# Altium PCB PCB_Master_Screen.PcbDoc
Units mm, origin at the board's own origin, x right, y up, seen from the top; angles counter-clockwise.
Board outline 112.9 x 78.91 mm, 2 copper layers (Top Layer, Bottom Layer), stack 1.571 mm thick; 43 components, 29 nets, 155 pads, 242 vias.
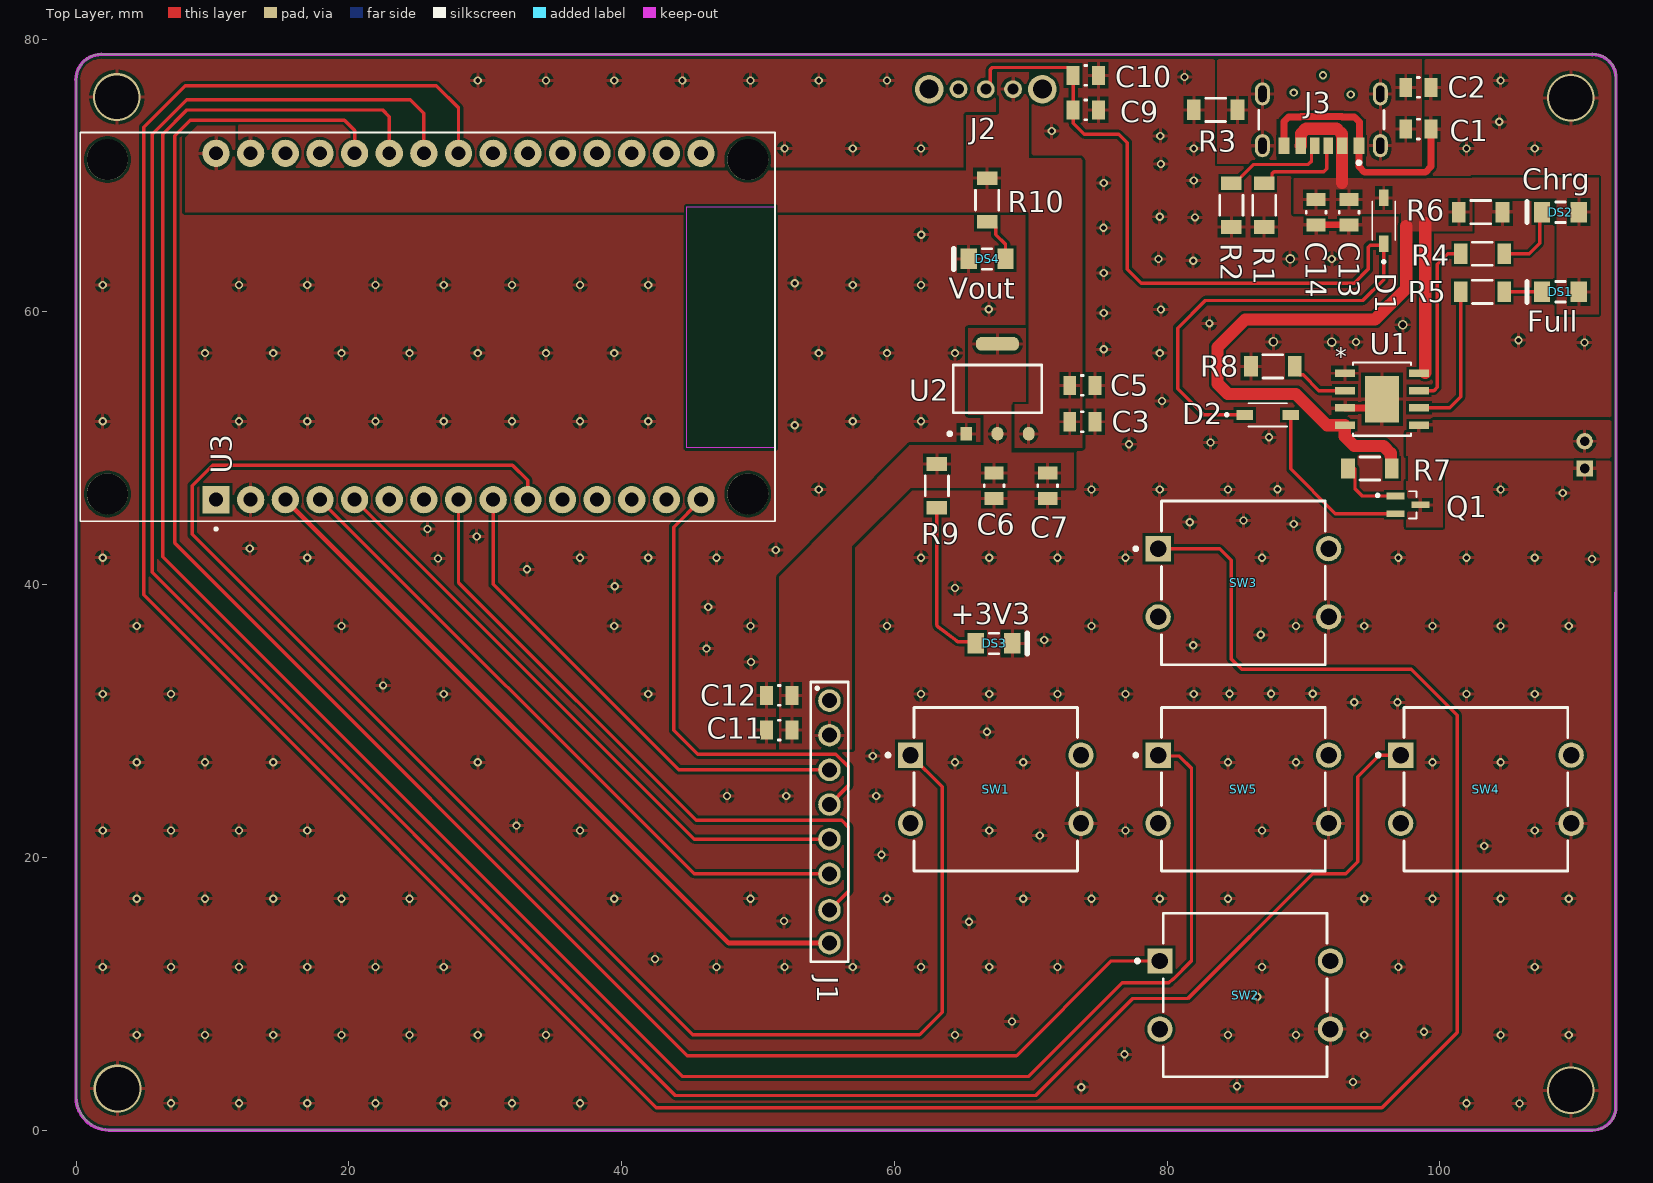
[diagram p0: Top Layer view]
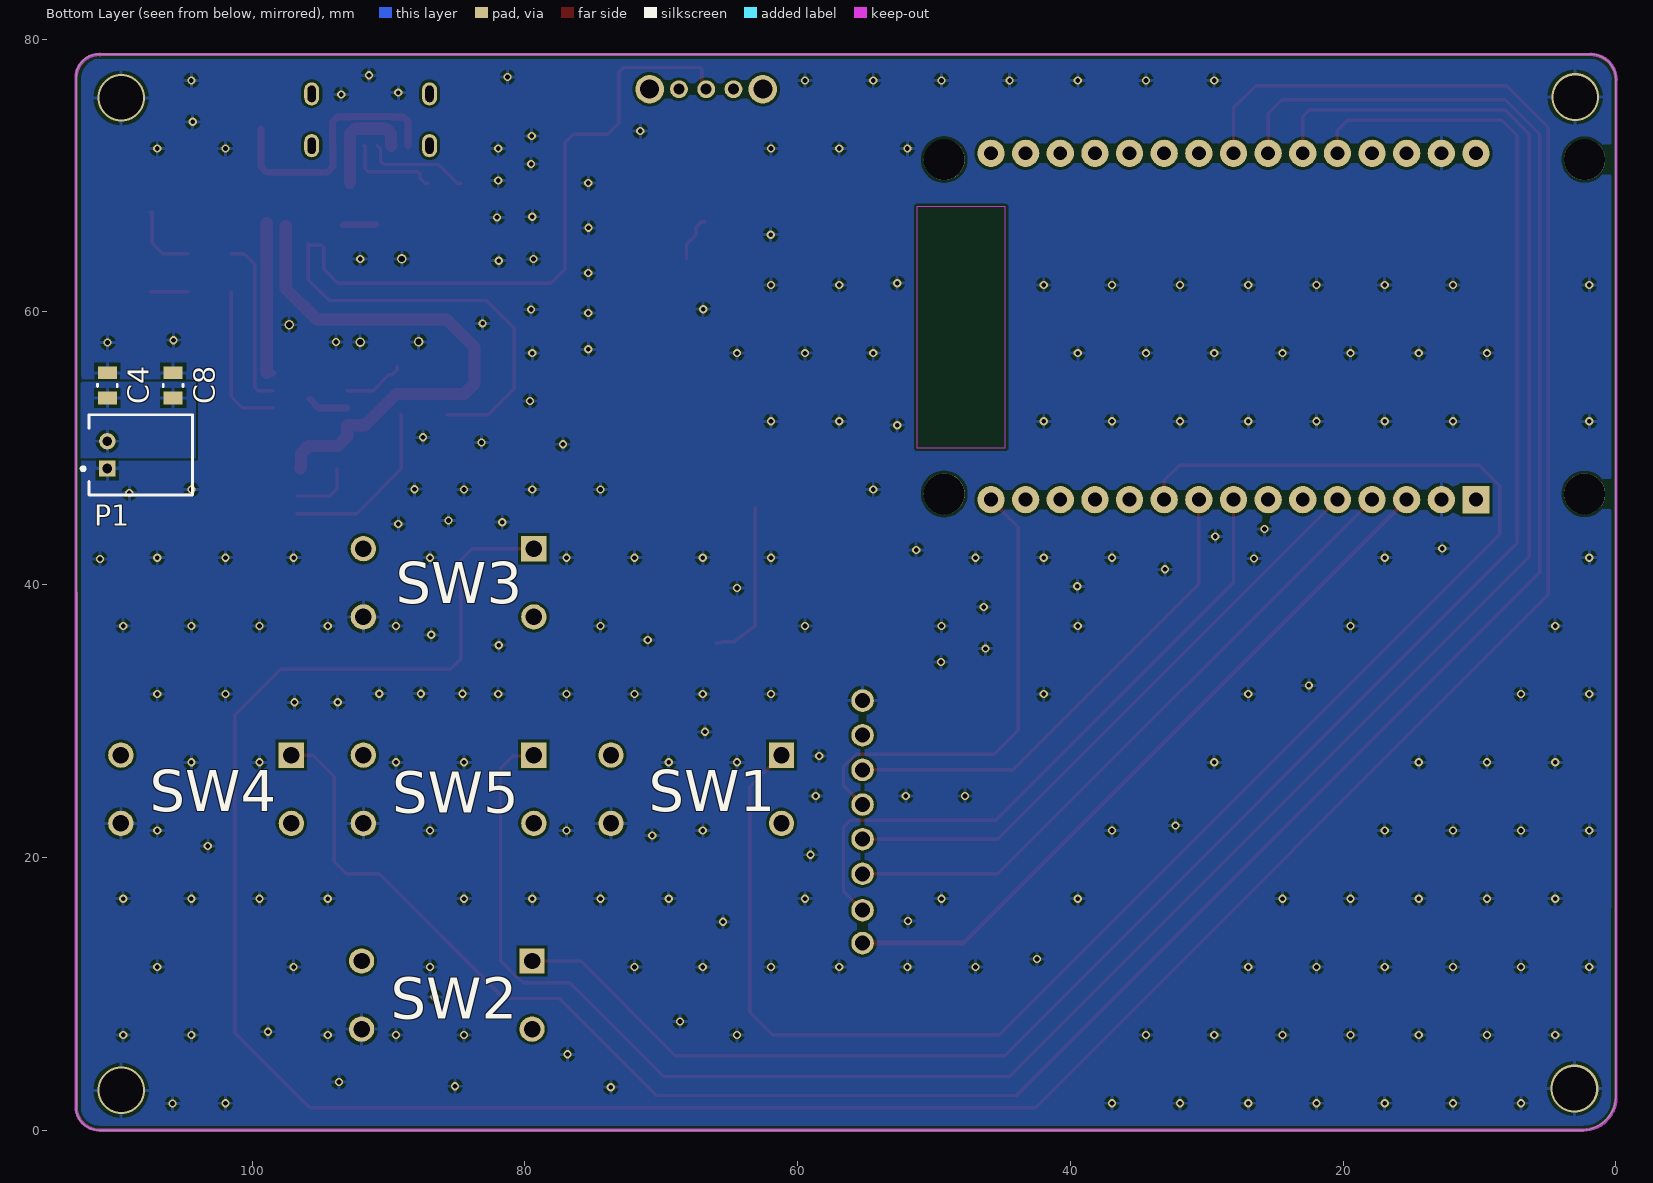
[diagram p1: Bottom Layer view, seen from below]
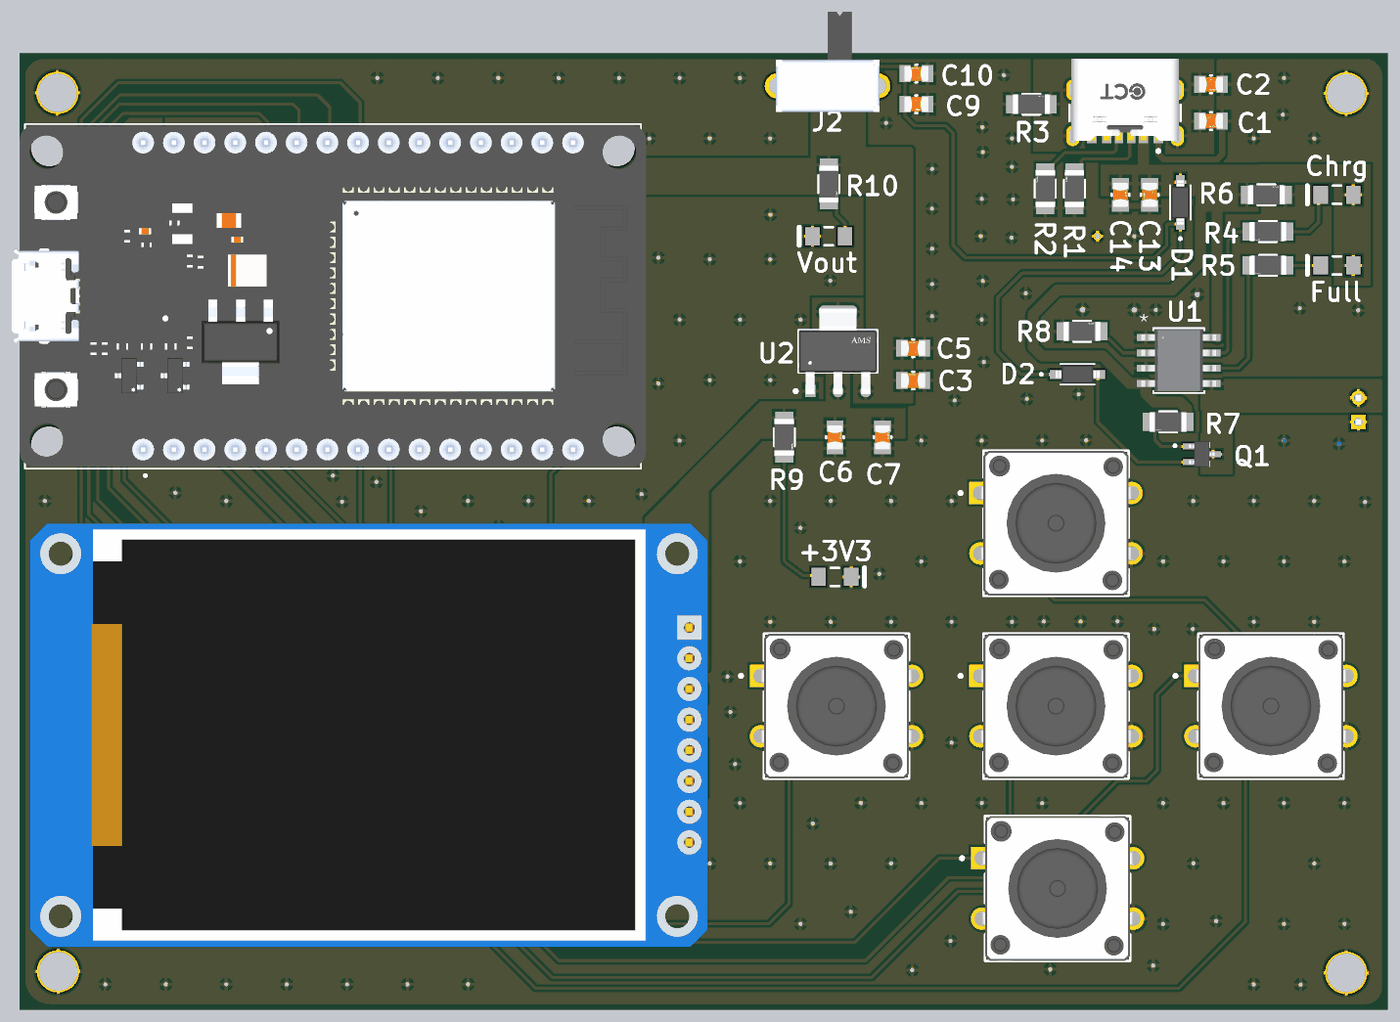
[diagram p2: 3D render of the assembled board from above, using the file's embedded part models]
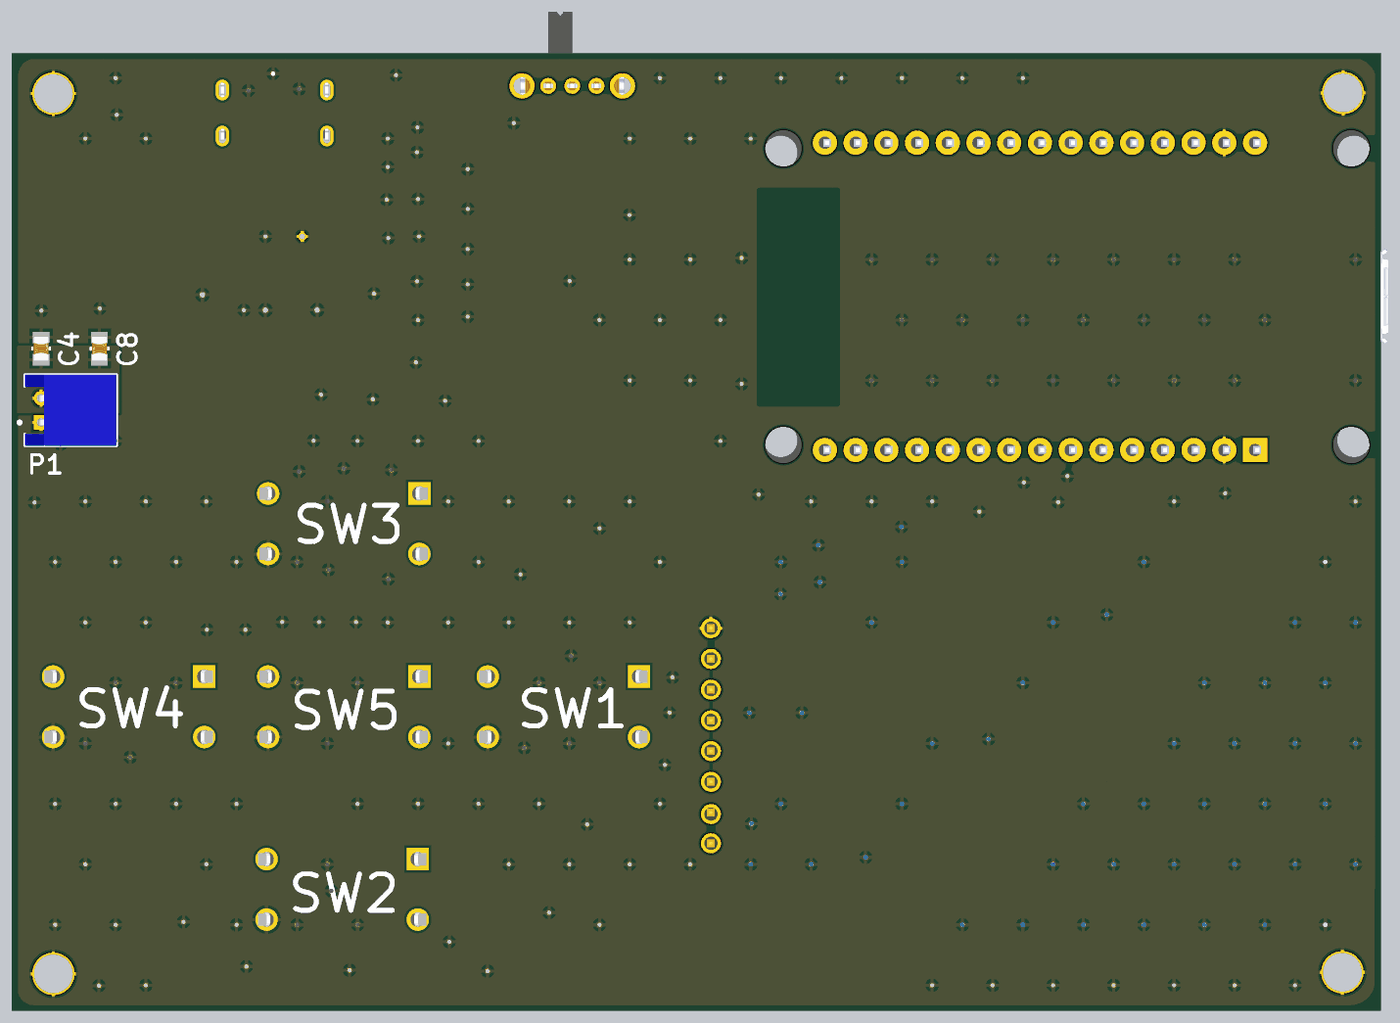
[diagram p3: 3D render of the assembled board from below, using the file's embedded part models]

## Layer stack, top to bottom
Top Solder: solder mask 0.0102, Solder Resist, Dk 3.5
Top Layer: signal copper 0.0356
Dielectric 1: dielectric 1.5, FR-4, Dk 4.8
Bottom Layer: signal copper 0.0356
Bottom Solder: solder mask 0.0102, Solder Resist, Dk 3.5

## Board outline
0,2.54 0,77 cw(c1.905,77) 1.905,78.905 111.252,78.905 111.233,78.905 cw(c111.233,77.235) 112.903,77.235 112.903,1.651 cw(c111.252,1.651) 111.252,0 2.54,0 cw(c2.54,2.54)

## Design rules (kind name [scope] priority, off if disabled: settings)
Clearance [All] p1: gap=0.2 ignorepadtopadclearanceinfootprint=FALSE
HoleSize HoleSize_1 [All] p1: absolutevalues=TRUE maxlimit=6.3 minlimit=0.15 maxpercent=80.000 minpercent=20.000
MinimumSolderMaskSliver MinimumSolderMaskSliver_Switch [InComponent('J2')] p1: minsoldermaskwidth=0.15
MinimumSolderMaskSliver [All] p2: minsoldermaskwidth=0.254
PolygonConnect [All] p1: connectstyle=Relief reliefconductorwidth=0.254 reliefentries=4 polygonreliefangle="90 Angle" airgapwidth=0.254
RoutingVias [All] p1: holewidth=0.3 width=0.3 viastyle="Through Hole" minholewidth=0.3 minwidth=0.25 maxholewidth=6.3 maxwidth=6.3
SolderMaskExpansion [All] p1: expansion=0.102 istentingtop=FALSE
SupplyNets "Schematic Supply Nets_5" [InNet('GND')] p1: voltage=0.000
SupplyNets "Schematic Supply Nets_4" [InNet('VOUT')] p2: voltage=0.000
SupplyNets "Schematic Supply Nets_3" [InNet('VBUS')] p3: voltage=0.000
SupplyNets "Schematic Supply Nets_2" [InNet('VBAT')] p4: voltage=0.000
SupplyNets "Schematic Supply Nets_1" [InNet('+3V3')] p5: voltage=0.000
SupplyNets "Schematic Supply Nets" [InNet('GND_EARTH')] p6: voltage=0.000
Width Width_BL [InNet('BL')] p1: maxlimit=0.5 minlimit=0.3 preferedwidth=0.3 minimp=50.000000 maximp=50.000000 favimp=50.000000
Width Width_Power [InNet('GND_EARTH') OR InNet('+3V3')OR InNet('VBUS')OR InNet('GND') OR InNet('VBAT') OR InNet('VOUT')] p2: maxlimit=1 minlimit=0.5 preferedwidth=0.6 minimp=50.000000 maximp=50.000000 favimp=50.000000
Width Width_1 [All] p3: maxlimit=0.3 minlimit=0.15 preferedwidth=0.2 minimp=50.000000 maximp=50.000000 favimp=50.000000
28 further rules are at their usual default settings.

## Components (designator, comment, footprint, x,y, rotation, side; value= is the part's Value field where it differs from the comment)
C1 "100nF" FP-CC0805-0_85-MFG 98.425,73.406 r0 top value="100 nF"
C2 "1nF" FP-CC0805-0_85-MFG 98.425,76.454 r0 top value="100 nF"
C3 "10uF" FP-CC0805-0_85-MFG 73.787,51.943 r180 top value="100 nF"
C4 "100nF" FP-CC0805-0_85-MFG 110.617,54.61 r90 bottom value="100 nF"
C5 "100nF" FP-CC0805-0_85-MFG 73.787,54.61 r180 top value="100 nF"
C6 "10uF" FP-CC0805-0_85-MFG 67.31,47.244 r90 top value="100 nF"
C7 "100nF" FP-CC0805-0_85-MFG 71.247,47.244 r90 top value="100 nF"
C8 "10uF" FP-CC0805-0_85-MFG 105.791,54.61 r270 bottom value="100 nF"
C9 "10uF" FP-CC0805-0_85-MFG 74.041,74.803 r0 top value="100 nF"
C10 "100nF" FP-CC0805-0_85-MFG 74.041,77.343 r180 top value="100 nF"
C11 "100nF" FP-CC0805-0_85-MFG 51.562,29.337 r0 top value="100 nF"
C12 "10uF" FP-CC0805-0_85-MFG 51.562,31.877 r180 top value="100 nF"
C13 "100nF" FP-CC0805-0_85-MFG 93.345,67.31 r270 top value="100 nF"
C14 "10uF" FP-CC0805-0_85-MFG 90.932,67.31 r90 top value="100 nF"
D1 "1N5819HW-7-F" SOD3715X145N 95.885,66.675 r90 top value="Vf = 450 mV"
D2 "1N5819HW-7-F" SOD3715X145N 87.376,52.451 r0 top value="Vf = 450 mV"
DS1 "Green LED" LUMX-SML-LX1206IC_V 108.839,61.468 r180 top
DS2 "Red LED" LUMX-SML-LX1206IC_V 108.839,67.31 r180 top
DS3 "Red LED" LUMX-SML-LX1206IC_V 67.31,35.687 r0 top
DS4 "Green LED" LUMX-SML-LX1206IC_V 66.802,63.881 r180 top
J1 "ST7735" ST7735 55.245,22.606 r270 top locked value="1.8 Inch 128x160"
J2 "SK12D07VG4" SK12D07VG4 66.707,76.327 r180 top value="0.3A @ 30 VDC"
J3 "USB4125-GF-A-0190" FP-USB4125-GF-A-0190-MFG 91.313,75.184 r180 top
P1 "S2B-PH-K-S(LF)(SN)" JST-S2B-PH-K-S_V 108.167,49.514 r90 bottom locked
Q1 "BSS84W-7-F" SOT65P222X110-3N 97.663,45.847 r0 top value="0 V 130mA"
R1 "5.1k" FP-RC1206-MFG 87.122,67.818 r90 top value=0Ω
R2 "5.1k" FP-RC1206-MFG 84.709,67.818 r90 top value=0Ω
R3 "1M" FP-RC1206-MFG 83.566,74.803 r0 top value=0Ω
R4 "1k" FP-RC1206-MFG 103.124,64.262 r180 top value=0Ω
R5 "1k" FP-RC1206-MFG 103.124,61.468 r180 top value=0Ω
R6 "100k" FP-RC1206-MFG 102.997,67.31 r0 top value=0Ω
R7 "100R" FP-RC1206-MFG 94.869,48.514 r180 top value=0Ω
R8 "1k" FP-RC1206-MFG 87.757,56.007 r0 top value=0Ω
R9 "330R" FP-RC1206-MFG 63.119,47.244 r270 top value=0Ω
R10 "330R" FP-RC1206-MFG 66.802,68.199 r270 top value=0Ω
SW1 "MJTP1212A" FP-MJTP1212A-MFG 67.437,24.997 r0 top locked value="0.05A @ 12VDC"
SW2 "MJTP1212A" FP-MJTP1212A-MFG 85.725,9.906 r0 top locked value="0.05A @ 12VDC"
SW3 "MJTP1212A" FP-MJTP1212A-MFG 85.598,40.132 r0 top locked value="0.05A @ 12VDC"
SW4 "MJTP1212A" FP-MJTP1212A-MFG 103.378,24.997 r0 top locked value="0.05A @ 12VDC"
SW5 "MJTP1212A" FP-MJTP1212A-MFG 85.598,24.997 r0 top locked value="0.05A @ 12VDC"
U1 "TP4056" SOP8-PP_TPW 95.758,53.594 r0 top value="1A single cell"
U2 "AMS1117-3.3" FP-AMS1117-IPC_C 67.564,54.356 r90 top
U3 "ESP32-DEVKIT-V1" MODULE_ESP32_DEVKIT_V1 25.781,58.928 r90 top locked value="Dual Core, Wi-Fi, BLE"

## Footprints (in the part's own frame and the unit in brackets; to place one, negate y for a bottom-side part, rotate by r counter-clockwise, add the part's x,y. Pads: shape width x height; smd on the part's side, far side on the other; paste and mask are expansions set on the pad)
FP-AMS1117-IPC_C [mm]
  rect 1.004x0.872 smd paste+0 mask+0: 1(-3.295,2.29)
  rrect100% 1.004x0.872 smd paste+0 mask+0: 2(-3.295,0) 3(-3.295,-2.29)
  rrect87% 1.004x3.182 smd paste+0 mask+0: 4(3.295,0)
  silkscreen extent -3.42,-3.25 1.75,3.62, body extent -3.9,-3.35 3.9,3.35, height 0.25
FP-CC0805-0_85-MFG [mm]
  rect 0.95x1.4 smd paste+0 mask+0: 1(-0.925,0) 2(0.925,0)
  silkscreen extent -0.08,-0.72 0.08,0.72, body extent -1.6,-1.05 1.6,1.05, height 0.25
FP-MJTP1212A-MFG [mm]
  rect 1.85x1.85 hole 1.2 paste-2539.97 mask+0: 1(-6.25,2.5)
  round 1.85 hole 1.2 paste-2539.97 mask+0: 2(6.25,2.5) 3(-6.25,-2.5) 4(6.25,-2.5)
  silkscreen extent -8.02,-6 6,6, body extent -7.27,-6.1 7.27,6.1, height 0.25
FP-RC1206-MFG [mm]
  rect 1x1.5 smd paste+0 mask+0: 1(-1.6,0) 2(1.6,0)
  silkscreen extent -0.72,-0.85 0.72,0.85, body extent -2.2,-0.95 2.2,0.95, height 0.25
FP-USB4125-GF-A-0190-MFG [mm]
  rrect100% 1.1x1.7 hole 1.2 slot 0.6 at 0 deg paste-2539.97 mask+0: 1(-4.32,3) 2(4.32,3) 3(-4.32,-0.8) 4(4.32,-0.8)
  rect 0.7x1.2 smd paste+0 mask+0: A5(-0.5,3) B5(0.5,3)
  rect 0.76x1.2 smd paste+0 mask+0: A9(1.52,3) B9(-1.52,3)
  rect 0.8x1.2 smd paste+0 mask+0: A12(2.75,3) B12(-2.75,3)
  silkscreen extent -4.59,0.43 4.59,4.37, body extent -4.97,-3.57 4.97,3.95, height 0.25
JST-S2B-PH-K-S_V [mm] "THD, 2-Leads, Body 7.6x5.9mm, Pitch 2mm"
  rect 1.2x1.2 hole 0.7: 1(-1,2.45)
  round 1.2 hole 0.7: 2(1,2.45)
  silkscreen extent -2.95,-3.8 2.95,4.35, body extent -2.95,-3.8 2.95,3.8, height 4.8
LUMX-SML-LX1206IC_V [mm] "SMD, 2-Leads, Body 3.2x1.5mm"
  rect 1.2x1.5 smd: 1(-1.35,0) 2(1.35,0)
  silkscreen extent -0.35,-0.75 2.45,0.75, body extent -1.6,-0.8 1.6,0.8, height 1.1
MODULE_ESP32_DEVKIT_V1 [mm]
  rect 2x2 / inner round 2 / far side rect 2x2 hole 1.02: 1(-12.7,15.515)
  round 2 hole 1.02: 2(-12.7,12.975) 3(-12.7,10.435) 4(-12.7,7.895) 5(-12.7,5.355) 6(-12.7,2.815) 7(-12.7,0.275) 8(-12.7,-2.265) 9(-12.7,-4.805) 10(-12.7,-7.345) 11(-12.7,-9.885) 12(-12.7,-12.425) 13(-12.7,-14.965) 14(-12.7,-17.505) 15(-12.7,-20.045) 16(12.7,-20.045) 17(12.7,-17.505) 18(12.7,-14.965) 19(12.7,-12.425) 20(12.7,-9.885) 21(12.7,-7.345) 22(12.7,-4.805) 23(12.7,-2.265) 24(12.7,0.275) 25(12.7,2.815) 26(12.7,5.355) 27(12.7,7.895) 28(12.7,10.435) 29(12.7,12.975) 30(12.7,15.515)
  round 3 hole 3 unplated: ""(-12.28,23.475) ""(-12.28,-23.475) ""(12.23,23.475) ""(12.23,-23.475)
  Keep-Out Layer region: 8.78,-25.475 -8.91,-25.475 -8.91,-18.985 8.78,-18.985
  Keep-Out Layer region: 8.78,-25.475 -8.91,-25.475 -8.91,-18.985 8.78,-18.985
  silkscreen extent -14.95,-25.48 14.23,25.48, body extent -14.1,-25.9 14.1,26.55, height 7.05
SK12D07VG4 [mm]
  round 1.308 hole 0.8: 1(-2,0) 2(2,0) COM(0,0)
  round 2.1 hole 1.4: M1(-4.15,0) M2(4.15,0)
  body extent -4.3,-6.15 4.3,2.15, height 4.7
SOD3715X145N [mm]
  rect 1.21x0.73 smd: A(1.68,0) C(-1.68,0)
  silkscreen extent -3.1,-0.85 1.43,0.85, body extent -1.83,-0.77 1.83,0.77, height 1.5
SOP8-PP_TPW [mil]
  rect 57.5x22 smd paste+0 mask+0: 1(-107.25,75) 2(-107.25,25) 3(-107.25,-25) 4(-107.25,-75) 5(107.25,-75) 6(107.25,-25) 7(107.25,25) 8(107.25,75)
  rect 99x134 smd paste-66.5 mask+0: EPAD(0,0)
  silkscreen extent -84,-106 84,106, body extent -122,-101 122,101, height 69
SOT65P222X110-3N [mm]
  rect 1.31x0.49 smd: 1(-0.925,0.65) 2(-0.925,-0.65) 3(0.925,0)
  silkscreen extent -2.32,-1 0.63,1, body extent -1.05,-1.07 1.05,1.07, height 1.1
ST7735 [mm] "1.8 inches 128x160 RGB TFT LCD - ST7735 DRIVER"
  round 1.65 hole 1.1: 1(-8.89,0) 2(-6.35,0) 3(-3.81,0) 4(-1.27,0) 5(1.27,0) 6(3.81,0) 7(6.477,0) 8(8.89,0)
  silkscreen extent -10.26,-1.37 10.26,1.37, body extent -17.5,-54.48 17.5,1.52, height 6.75

## Part data
C1 C2 C3 C4 C5 C6 C7 C8 C9 C10 C11 C12 C13 C14: library part CMP-1036-04402-6, "CAP CER 0.1UF 16V X7R 0805", Capacitance="100 nF", Manufacturer=Yageo, Manufacturer Part Number=CC0805KRX7R7BB104, Package=CC0805-0.85, Temperature="-30°C to +85°C", Temperature Characteristic=X7R, Temperature Range High=+85°C, Temperature Range Low=-30°C, Tolerance=0.1, Voltage Rating="16 V", Automotive=No, Category=Cap, ComponentLink2Description=Datasheet, ComponentLink2URL=http://www.yageo.com/documents/recent/UPY-GPHC_Y5V_6.3V-to-50V_8.pdf, Device Class L1="Passive Components", Device Class L2=Capacitors, Device Class L3="Ceramic Capacitors", Digikey Description="CAP CER 0.1UF 16V X7R 0805", Footprint Url=http://www.yageo.com/exep/pages/download/literatures/UPY-C_GEN_24.pdf, Height=0.95mm, Ipc Land Pattern Name=CAPC200125X85, Lead Free=Yes, Material=Ceramic, Mouser Description="Multilayer Ceramic Capacitors MLCC - SMD/SMT 100nF 16V X7R 10%", Octopart=https://octopart.com/cc0805krx7r7bb104-yageo-39467769, RoHS=TRUE
D1 D2: "Schottky Diodes & Rectifiers SOD-123", Package="SOD-123 Fairchild Semiconductor", TempMax=125, TempMin=-65, Availability="In Stock", Check_prices=https://www.snapeda.com/parts/1N5819HW-7-F/Diodes+Inc./view-part/?ref=eda, Link=https://4donline.ihs.com/images/VipMasterIC/IC/DIOD/DIOD-S-A0011437026/DIOD-S-A0011683586-1.pdf?hkey=CECEF36DEECDED6468708AAF2E19C0C6, MF="Diodes Inc.", MP=1N5819HW-7-F, Part Number=1N5819HW-7-F, PartID=1N5819HW-7-F, Price=None, Purchase-URL=https://pricing.snapeda.com/search/part/1N5819HW-7-F/?ref=eda, SnapEDA_Link=https://www.snapeda.com/parts/1N5819HW-7-F/Diodes+Inc./view-part/?ref=snap
DS1 DS2 DS3 DS4: library part CMP-2000-07123-1, "LED Red, 65 mW, -40 to 85 degC, 2-Pin SMD, RoHS, Tape and Reel", Color=Red, Manufacturer=Lumex, Operating Temperature=-25to85C, Package Description="2-Pin Surface Mount Device, Body 3.2 x 1.5 mm", Package Reference=SML-LX1206IC, Part No=SML-LX1206IC-TR, Reverse Voltage=5(Min)V, Supplier_Package=SMD, Datasheet URL=http://www.lumex.com/content/files/ProductAttachment/SML-LX1206IC-TR.pdf, Datasheet Version="Rev. J, 08/2012", Dimension=3.2x1.6x1.1mm, Dominant Wavelength=N/A, ECCN=EAR99, Family=SML-LX1206IC, HTS=8541402000, Intensity=6mcd, LED Material=GaAsP, Lens Appearance=ColorlessNonDiffused, Lens Dimensions=2x1.6x0.5mm, Manufacturer URL=http://www.lumexinstruments.com/, Mounting=SurfaceMount, Mounting Technology=SurfaceMount, Number of LEDs=1, Packaging=TapeandReel, Peak Wavelength=635nm, Pin_Count=2, RoHS=Unknown, Supplier=Lumex, Supplier Standard Pack=3,000, Type=Uni-Color, Viewing Angle=160
J1: library part TFT-ST7735, "1.8 inches 128x160 RGB TFT LCD - ST7735 DRIVER", TempMax=80, TempMin=-30, Link=https://grabcad.com/library/1-8-inches-128x160-rgb-tft-lcd-st7735-driver-1, Part Number=TFT-ST7735, PartID=TFT-ST7735
J2: "Slide Switches - Side Knob", Package=None, TempMax=70, TempMin=-20, Check_prices=https://www.snapeda.com/parts/SK12D07VG4/C%2526K/view-part/?ref=eda, Link=https://www.snapeda.com/parts/SK12D07VG4/C&K/datasheet/, MF=C&K, MP=SK12D07VG4, Part Number=SK12D07VG4, PartID=SK12D07VG4, SnapEDA_Link=https://www.snapeda.com/parts/SK12D07VG4/C%2526K/view-part/?ref=snap
J3: library part CMP-245163-000004-1, "CONN RCPT TYPE C 6P SMD RA"
P1: library part CMP-1755-00004-1, "Male Header, Pitch 2 mm, 1 x 2 Position, Height 4.8 mm, Tail Length 3.4 mm, -25 to 85 degC, RoHS, Bulk", Capacitance="10 uF", Case\Package=Radial, Max Operating Temperature="85 degC", Min Operating Temperature="-40 degC", Package Quantity=200, Tolerance=20%, Voltage Rating="50 V", ComponentLink1Description=Datasheet, ComponentLink1URL=http://www.jst-mfg.com/product/pdf/eng/ePH.pdf, DatasheetVersion=Dec-12, Diameter="5 mm", Height="11 mm", Lead Pitch="2 mm", Length="11 mm", Mount="Through Hole", PackageDescription="Male Header, Pitch 2 mm, 1 x 2 Position, Height 4.8 mm, Tail Length 3.4 mm", PackageReference=S2B-PH-K-S, Packaging=Bulk, Pins=2, Radiation Hardening=No, REACH SVHC="No SVHC", RoHSCompliant=true, Voltage Rating (DC)="50 V"
Q1: "MOSFET P-Channel 50V 130MA SOT323", Package="SOT-323 Diodes Inc.", TempMax=150, TempMin=-55, Availability="In Stock", Check_prices=https://www.snapeda.com/parts/BSS84W-7-F/Diodes+Inc./view-part/?ref=eda, Link=https://www.diodes.com/assets/Datasheets/BSS84W.pdf, MF="Diodes Inc.", MP=BSS84W-7-F, Part Number=BSS84W-7-F, PartID=BSS84W-7-F, Price=None, Purchase-URL=https://pricing.snapeda.com/search/part/BSS84W-7-F/?ref=eda, SnapEDA_Link=https://www.snapeda.com/parts/BSS84W-7-F/Diodes+Inc./view-part/?ref=snap
R1 R2 R3 R4 R5 R6 R7 R8 R9 R10: library part CMP-2100-03681-2, "RES SMD 0 OHM JUMPER 1/4W 1206", Manufacturer=YAGEO, Manufacturer Part Number=RC1206JR-070RL, Package=RC1206, Power Rating=0.25W, Resistance=0Ω, Temperature="-55°C to +155°C", Temperature Coefficient=300ppm/°C, Temperature Range High=+155°C, Temperature Range Low=-55°C, Tolerance=5%, Voltage Rating=200V, Automotive=No, Category=Res, ComponentLink2Description=Datasheet, ComponentLink2URL=https://www.yageo.com/upload/media/product/productsearch/datasheet/rchip/PYu-RC_Group_51_RoHS_L_10.pdf, Composition="Thick Film", Device Class L1="Passive Components", Device Class L2=Resistors, Device Class L3="Chip SMD Resistors", Digikey Description="RES SMD 0 OHM JUMPER 1/4W 1206", Footprint Url=https://www.yageo.com/upload/website/yageo_PYu-R_Mount_10_19050818_343.pdf, Height=0.65mm, Ipc Land Pattern Name=RESC310160X55, Lead Free=Yes, Mouser Description="Resistor: thick film; SMD; 1206; 0O; 0.25W; ±5%; -55÷155°C", Octopart=https://octopart.com/rc1206jr-070rl-yageo-40025601, RoHS=TRUE, Series=RC
SW1 SW2 SW3 SW4 SW5: "Switch Tactile Button 12x12mm", Contact Resistance=100mR, Current Rating=50mA, Max Operating Temperature=70°C, Max Voltage Rating (DC)=12V, Min Operating Temperature=-20°C, Operating Force=160gf, Package Quantity=100, TempMax=70, TempMin=-25, Actuator Length=3.5mm, Actuator Material=Polyoxymethylene, Actuator Type=Standard, Contact Material=Bronze, Contact Plating=Silver, Electrical Life=100000Cycles, Illumination Type=Non-Illuminated, Link=https://www.digikey.de/de/products/detail/omron-electronics-inc-emc-div/B3F-4055/31799?gclsrc=aw.ds&gad_source=1&gad_campaignid=19971370784&gbraid=0AAAAADrbLlgb8g5iB56Pq7GBfmlW8M2um&gclid=CjwKCAiA2svIBhB-EiwARWDPjsxJrtH3aqZi4wzUZvXY0ugmwA-CuPqPru_7AumdmvXcQLZq2TM71hoCQyEQAvD_BwE, Mechanical Life=100000Cycles, Mount="Through Hole", Orientation=Straight, Packaging=Bulk, Part Number=MJTP1212A, PartID=MJTP1212A, REACH SVHC="No SVHC", Switch Function=Off-Mom, Switch Travel=0.3mm, Termination="PC Pin", Throw Configuration=SPST, Voltage Rating (DC)=12V
U1: "charger for single cell lithium-ion batteries", Manufacturer_Name=TPOWER, TempMax=85, TempMin=-40, Copyright="Copyright (C) 2025 Ultra Librarian. All rights reserved.", Link=https://dlnmh9ip6v2uc.cloudfront.net/datasheets/Prototyping/TP4056.pdf, Manufacturer_Part_Number=TP4056, Part Number=TP4056, PartID=TP4056, RefDes=RefDes, Type=Type
U2: library part CMP-209535-000001-1, "LDO Voltage Regulators 1A, 3.3V", Dropout Voltage=1.1V, Manufacturer="Advanced Monolithic Systems", Max Junction Temp=+125°C, Max Power Dissipation=1.2W, Max Supply Voltage=15V, Nominal Supply Current=5mA, Output Current=1A, Output Voltage=3.3V, Package=AMS1117, Temperature="-40°C to +125°C", Temperature Range Low=-40°C, Automotive=No, Category=IC, ComponentLink2Description=Datasheet, ComponentLink2URL=http://www.advanced-monolithic.com/pdf/ds1117.pdf, Device Class L1="Integrated Circuits (ICs)", Device Class L2="Power Management ICs", Device Class L3="Voltage Regulators - Linear", Height=1.8mm, Ipc Land Pattern Name=SOT229P700X180-4, Lead Free=Yes, Manufacturer Part Number=AMS1117-3.3, Number Of Outputs=1, Octopart=https://octopart.com/ams1117-3.3-advanced+monolithic+systems-25899300, Output Type=Fixed, RoHS=TRUE, Standoff Height=0.64mm, Temperature Range High=+125°C
U3: "ESP32-DEVKIT-V1 30 Pins", Package=None, TempMax=85, TempMin=-40, Check_prices=https://www.snapeda.com/parts/ESP32-DEVKIT-V1/Do+it/view-part/?ref=eda, Link=https://www.snapeda.com/parts/ESP32-DEVKIT-V1/Do+it/view-part/?ref=eda, MF="Do it", MP=ESP32-DEVKIT-V1, Part Number=ESP32-DEVKIT-V1, PartID=ESP32-DEVKIT-V1, SnapEDA_Link=https://www.snapeda.com/parts/ESP32-DEVKIT-V1/Do+it/view-part/?ref=snap

## Via types
v1: diameter 0.6, hole 0.35, Top Layer to Bottom Layer, tented both sides, 234 vias
v2: diameter 3.5, hole 3.2, Top Layer to Bottom Layer, 4 vias
v3: diameter 0.7, hole 0.45, Top Layer to Bottom Layer, tented both sides, 3 vias
v4: diameter 0.7, hole 0.45, Top Layer to Bottom Layer, 1 vias

## Nets (pads, with @x,y where several pads share a name; then routed paths per layer and width w, separated by ;. In a path a pad name is that pad's centre, name@x,y a point inside that pad or via, vN(x,y) a via of type N, cw(c..) or ccw(c..) an arc to the next point about the centre after c; other vN are vias at no path point)
+3V3: C6.2 C7.2 C11.2 C12.1 J1.2 R9.1 U2.2 U2.4
BL: J1.8 U3.3 | length 53.4
  Top Layer w0.35: U3.3 47.858,13.716 J1.8
CHRG: R4.2 U1.7 | length 12.5
  Top Layer w0.254: U1.7 99.568,54.229 99.822,54.483 99.822,63.5 100.584,64.262 R4.2
CLK: J1.3 U3.9 | length 36.5
  Top Layer w0.25: U3.9 30.586,40.026 44.196,26.416 J1.3
CSO: J1.7 U3.8 | length 48.8
  Top Layer w0.25: U3.8 28.046,40.153 45.473,22.726 56.141,22.726 56.642,22.225 56.642,17.526 J1.7
GND: C1.2 C2.2 C3.1 C4.2 C5.1 C6.1 C7.1 C8.1 C9.2 C10.1 C11.1 C12.2 C13.2 C14.1 DS3.2 DS4.2 J1.1 J3.A12 J3.B12 P1.1 R1.1 R2.1 R3.1 R6.2 R8.1 SW1.4 SW2.4 SW3.4 SW4.4 SW5.4 U1.1 U1.3 U1.EPAD U2.1 U3.2 U3.29 | length 24.7
  Top Layer w0.5: J3.A12 88.563,73.958 88.9,74.295 89.782,74.295 89.821,74.334 92.805,74.334 92.844,74.295 93.726,74.295 94.107,73.914 94.107,72.228 J3.B12 94.063,70.656 94.488,70.231 98.933,70.231 99.35,70.648 C1.2 ; C14.1 C13.2 ; U1.3 95.123,52.959 U1.EPAD
  other v1: 105.834,1.945 6.958,1.973 11.958,1.973 16.958,1.973 21.958,1.973 26.958,1.973 31.958,1.973 36.958,1.973 101.958,1.973 73.701,3.151 85.122,3.219 93.64,3.532 76.876,5.564 4.458,6.973 9.458,6.973 14.458,6.973 19.458,6.973 24.458,6.973 29.458,6.973 34.458,6.973 64.458,6.973 84.458,6.973 89.458,6.973 94.458,6.973 104.458,6.973 109.458,6.973 98.847,7.215 68.621,7.977 86.614,9.779 1.958,11.973 6.958,11.973 11.958,11.973 16.958,11.973 21.958,11.973 26.958,11.973 46.958,11.973 51.958,11.973 56.958,11.973 61.958,11.973 66.958,11.973 71.958,11.973 86.958,11.973 96.958,11.973 106.958,11.973 42.459,12.549 65.478,15.28 51.902,15.326 4.458,16.973 9.458,16.973 14.458,16.973 19.458,16.973 24.458,16.973 39.458,16.973 49.458,16.973 59.458,16.973 69.458,16.973 74.458,16.973 79.458,16.973 84.458,16.973 94.458,16.973 99.458,16.973 104.458,16.973 109.458,16.973 59.055,20.193 103.251,20.828 70.67,21.604 1.958,21.973 6.958,21.973 11.958,21.973 16.958,21.973 36.958,21.973 66.958,21.973 76.958,21.973 86.958,21.973 106.958,21.973 32.299,22.328 47.731,24.508 52.073,24.508 58.674,24.511 4.458,26.973 9.458,26.973 14.458,26.973 29.458,26.973 64.458,26.973 69.458,26.973 84.458,26.973 89.458,26.973 99.458,26.973 104.458,26.973 58.42,27.432 66.802,29.21 93.726,31.369 96.901,31.369 1.958,31.973 6.958,31.973 26.958,31.973 41.958,31.973 61.958,31.973 66.958,31.973 71.958,31.973 76.958,31.973 81.958,31.973 101.958,31.973 106.958,31.973 84.582,32.004 87.63,32.004 90.678,32.004 22.52,32.615 49.496,34.322 46.228,35.306 81.915,35.56 70.993,35.941 86.868,36.322 4.458,36.973 19.458,36.973 39.458,36.973 49.458,36.973 59.458,36.973 74.458,36.973 89.458,36.973 94.458,36.973 99.458,36.973 104.458,36.973 109.458,36.973 46.355,38.354 64.453,39.747 39.497,39.878 33.061,41.124 111.166,41.886 26.543,41.91 1.958,41.973 16.958,41.973 36.958,41.973 41.958,41.973 46.958,41.973 61.958,41.973 66.958,41.973 71.958,41.973 76.958,41.973 86.958,41.973 96.958,41.973 101.958,41.973 106.958,41.973 51.308,42.545 12.741,42.648 29.378,43.537 25.781,44.069 89.281,44.45 81.661,44.577 85.598,44.704 109.007,46.712 54.458,46.973 74.458,46.973 79.458,46.973 84.458,46.973 104.458,46.973 88.088,46.997 77.216,50.292 83.185,50.419 87.474,50.8 52.705,51.689 1.958,51.973 11.958,51.973 16.958,51.973 21.958,51.973 26.958,51.973 31.958,51.973 36.958,51.973 41.958,51.973 56.958,51.973 61.958,51.973 79.629,53.467 9.458,56.973 14.458,56.973 19.458,56.973 24.458,56.973 29.458,56.973 34.458,56.973 39.458,56.973 54.458,56.973 59.458,56.973 64.458,56.973 79.458,56.973 75.352,57.253 110.596,57.747 93.853,57.785 105.761,57.92 83.099,59.158 75.352,59.92 79.543,60.174 66.929,60.198 1.958,61.973 11.958,61.973 16.958,61.973 21.958,61.973 26.958,61.973 31.958,61.973 36.958,61.973 41.958,61.973 56.958,61.973 61.958,61.973 52.705,62.103 75.352,62.841 81.915,63.754 79.375,63.881 92.075,63.881 61.976,65.659 75.339,66.161 82.042,66.929 79.458,66.973 75.352,69.445 81.956,69.623 79.543,70.842 51.958,71.973 56.958,71.973 61.958,71.973 81.958,71.973 101.958,71.973 106.958,71.973 79.502,72.898 71.542,73.255 104.359,73.937 93.472,75.946 89.281,76.073 29.458,76.973 34.458,76.973 39.458,76.973 44.458,76.973 49.458,76.973 54.458,76.973 59.458,76.973 104.458,76.973 81.28,77.216 91.44,77.343
  other v2: 109.601,2.921 3.048,3.048 109.601,75.692 2.991,75.746
  other v3: 92.075,57.785 87.795,57.804 97.282,59.055
  other v4: 89.027,63.881
GND_EARTH: C1.1 C2.1 J3.1 J3.2 J3.3 J3.4 R3.2
GPIO2: J1.6 U3.4 | length 48.7
  Top Layer w0.25: U3.4 45.318,18.796 J1.6
GPIO4: J1.5 U3.5 | length 45.1
  Top Layer w0.25: U3.5 45.318,21.336 J1.5
GPIO14: SW2.1 U3.26 | length 136.2
  Top Layer w0.25: U3.26 20.426,73.3 19.685,74.041 8.382,74.041 7.239,72.898 7.239,43.053 44.831,5.461 68.961,5.461 75.906,12.406 SW2.1
GPIO19: SW1.1 U3.10 | length 121.4
  Top Layer w0.25: U3.10 33.126,47.646 32.004,48.768 10.033,48.768 8.509,47.244 8.509,43.688 45.212,6.985 61.849,6.985 63.5,8.636 63.5,25.184 SW1.1
GPIO25: SW3.1 U3.23 | length 231.3
  Top Layer w0.25: U3.23 28.046,74.951 26.416,76.581 8.001,76.581 4.953,73.533 4.953,39.243 42.545,1.651 95.758,1.651 101.269,7.162 ; SW3.1 83.86,42.632 84.709,41.783 84.709,34.544
  Top Layer w0.254: 84.709,34.544 85.471,33.782 97.917,33.782 101.269,30.43 101.269,7.162
GPIO26: SW4.1 U3.24 | length 177.9
  Top Layer w0.25: U3.24 25.506,74.57 24.511,75.565 8.128,75.565 5.588,73.025 5.588,40.894 43.942,2.54 70.358,2.54 77.47,9.652 81.534,9.652 90.678,18.796 93.091,18.796 93.98,19.685 93.98,25.908 95.569,27.497 SW4.1
GPIO27: SW5.1 U3.25 | length 162.9
  Top Layer w0.25: U3.25 22.966,74.316 22.479,74.803 8.128,74.803 6.35,73.025 6.35,42.037 44.45,3.937 69.85,3.937 76.708,10.795 80.137,10.795 80.413,11.071 80.449,11.071 81.788,12.409 81.788,26.543 80.899,27.432 79.413,27.432 SW5.1
MOSI: J1.4 U3.15 | length 35
  Top Layer w0.25: U3.15 43.815,44.217 43.815,29.337 45.586,27.566 55.721,27.566 56.642,26.645 56.642,25.273 J1.4
NetC9_1: C9.1 C10.2 D1.C D2.C J2.COM | length 75.9
  Top Layer w0.254: J2.COM@66.834,76.605 67.036,76.807 67.036,77.767 67.184,77.916 72.768,77.916 73.116,77.568 C10.2 C9.1 73.116,73.823 73.914,73.025 76.454,73.025 77.089,72.39 77.089,63.119 78.105,62.103 93.726,62.103 94.764,63.141 94.764,63.351 94.742,63.373 94.742,64.748 94.891,64.897 95.787,64.897 D1.C 95.885,64.897 95.885,62.357 94.361,60.833 82.804,60.833 80.772,58.801 80.772,54.356 82.677,52.451 D2.C
NetD2_A: D2.A Q1.2 | length 13
  Top Layer w0.254: D2.A 89.056,48.485 92.344,45.197 Q1.2
NetDS1_2: DS1.2 R5.1 | length 2.8
  Top Layer w0.254: R5.1 DS1.2
NetDS2_2: DS2.2 R4.1 | length 5.4
  Top Layer w0.254: R4.1 106.553,64.262 107.315,65.024 107.315,67.31 DS2.2
NetDS3_1: DS3.1 R9.2 | length 11.9
  Top Layer w0.25: R9.2 63.119,37.082 ccw(c63.369,37.082) 63.219,36.882 64.587,35.856 ccw(c64.737,36.056) 64.737,35.806 65.485,35.806 DS3.1
NetDS4_1: DS4.1 R10.2 | length 3.4
  Top Layer w0.25: R10.2 67.052,66.599 67.427,66.224 67.427,65.669 68.152,64.944 DS4.1
NetJ3_A5: J3.A5 R1.2 | length 7
  Top Layer w0.254: R1.2 87.319,69.418 87.692,69.791 87.692,70.129 87.84,70.278 91.487,70.278 91.694,70.485 91.694,72.184 J3.A5
NetJ3_B5: J3.B5 R2.2 | length 7.8
  Top Layer w0.25: R2.2 84.959,69.418 86.349,70.808 90.366,70.808 90.588,71.03 90.588,71.959 J3.B5
NetQ1_1: Q1.1 R7.2 | length 4.7
  Top Layer w0.254: 93.777,48.514 93.777,47.016 94.296,46.497 Q1.1
NetR8_2: R8.2 U1.2 | length 4.6
  Top Layer w0.254: R8.2 89.357,55.757 89.73,55.384 89.98,55.384 91.135,54.229 U1.2
STDBY: R5.2 U1.6 | length 11.1
  Top Layer w0.254: U1.6 100.711,52.959 101.524,53.772 R5.2
VBAT: C4.1 C8.2 P1.2 Q1.3 U1.5
VBUS: C13.1 C14.2 D1.A DS1.1 DS2.1 J3.A9 J3.B9 R6.1 R7.1 U1.4 U1.8 | length 58.5
  Top Layer w0.5: 92.833,69.469 92.837,69.469 ; U1.8 98.904,55.499 U1.8@98.933,55.528
  Top Layer w0.9: J3.A9 89.813,72.204 89.813,73.053 90.194,73.434 90.678,73.434 91.194,73.434 92.417,73.434 92.456,73.395 92.471,73.395 92.833,73.033 J3.B9 92.833,69.469 ; R7.1 96.419,48.564 96.419,49.428 96.393,49.454 96.393,49.638 95.866,50.165 93.726,50.165 93.034,50.857 U1.4 91.72,51.689 89.434,53.975 84.455,53.975 83.693,54.737 83.693,57.404 85.725,59.436 95.25,59.436 97.536,61.722 97.536,66.294 ; U1.8@98.933,55.528 98.933,66.49
VOUT: C3.2 C5.2 J2.1 R10.1 U2.3 U3.30
pads on no net: J2.2 J2.M1 J2.M2 SW1.2 SW1.3 SW2.2 SW2.3 SW3.2 SW3.3 SW4.2 SW4.3 SW5.2 SW5.3 U3. U3.1 U3.6 U3.7 U3.11 U3.12 U3.13 U3.14 U3.16 U3.17 U3.18 U3.19 U3.20 U3.21 U3.22 U3.27 U3.28

## Polygon pours and split planes (outlines as drawn)
GND on Top Layer "GND_L01_P017" (solid, remove dead copper, pour order 17): 1.235,78.436 cw(c1.542,78.129) 1.542,78.563 111.344,78.563 cw(c111.344,77.293) 112.614,77.293 112.614,1.601 cw(c111.217,1.601) 111.217,0.204 2.378,0.204 cw(c2.378,2.363) 0.219,2.363 0.219,77.039 cw(c1.743,77.039) 1.743,78.563
VBUS on Top Layer "VBUS_L01_P018" (solid, pour order 18): 97.155,69.801 89.077,69.801 89.077,66.675 97.155,66.675
VBUS on Top Layer "VBUS_L01_P011" (solid, pour order 11): 102.362,68.326 108.585,68.326 108.585,59.817 111.633,59.817 111.633,69.85 102.362,69.85
VBAT on Top Layer "VBAT_L01_P013" (solid, pour order 13): 97.536,52.07 97.536,44.196 100.203,44.196 100.203,49.276 112.649,49.276 112.649,52.07 102.489,52.07
VBUS on Top Layer "VBUS_L01_P009" (solid, pour order 9): 97.155,65.913 102.362,65.913 102.362,69.792 97.155,69.792
GND_EARTH on Top Layer "GND_EARTH_L01_P006" (solid, pour order 6): 83.693,78.74 83.693,70.866 88.011,70.866 88.011,74.168 94.615,74.168 94.615,70.612 98.679,70.612 98.679,78.74
+3V3 on Top Layer "+3V3_L01_P004" (solid, pour order 4): 61.251,50.34 51.562,40.583 51.562,27.94 56.896,27.94 56.896,42.799 61.214,47.117
+3V3 on Top Layer "+3V3_L01_P003" (solid, pour order 3): 69.85,57.15 69.85,58.801 65.405,58.801 65.405,52.451 66.548,52.451 66.548,50.225 61.087,50.225 61.087,47.117 73.152,47.117 73.152,49.657 68.58,49.657 68.58,53.213 69.85,53.213
VOUT on Top Layer "VOUT_L01_P000" (solid, pour order 0): 67.564,77.724 69.85,77.724 69.85,71.247 73.787,71.247 73.787,50.038 68.834,50.038 68.834,53.213 69.85,53.213 69.85,67.31 8.001,67.31 8.001,72.771 8.89,73.66 11.684,73.66 11.684,70.358 65.278,70.358 65.278,74.422 67.564,74.422
GND on Bottom Layer "GND_L02_P016" (solid, pour order 16): 0.254,73.914 0.254,76.708 cw(c2.159,76.708) 2.159,78.613 110.998,78.613 cw(c110.998,77.089) 112.522,77.089 112.522,1.524 cw(c111.252,1.524) 111.252,0.254 2.413,0.254 cw(c2.413,2.286) 0.381,2.286
VBAT on Bottom Layer "VBAT_L02_P014" (solid, pour order 14): 104.14,54.864 104.14,49.276 112.649,49.276 112.649,54.864

## Keep-outs
Keep-Out Layer:
  lines w0.25: -0.01,77.025 cw(c1.841,77.025) 1.841,78.877 111.188,78.867 ; 0,77.025 0,2.413 ccw(c2.413,2.413) 2.413,0 111.188,-0.001 ccw(c111.188,1.714) 112.904,1.714 ; 111.188,78.878 cw(c111.188,77.153) 112.914,77.153 112.903,1.778

## Silkscreen, mask and mechanical layers (free items; w line width, h text height)
Top Overlay:
  text "Chrg" at 106.045,68.961 h1.52
  text "Vout" at 64.008,60.96 h1.52
  text "Full" at 106.426,58.547 h1.52
  text "+3V3" at 64.135,37.084 h1.52
Board Outer:
  lines w0.25: 0,77 cw(c1.905,77) 1.905,78.905 111.252,78.905 ; 0,77.089 0,2.54 ccw(c2.54,2.54) 2.54,0 111.252,0 ccw(c111.252,1.651) 112.903,1.651 112.903,77.235 ccw(c111.233,77.235) 111.233,78.905

## Text inside footprints (layer, text, board x,y; h text height)
U1: Top 3D Body "RefDes2" at 93.535,52.959 h1.27; Top 3D Body "*" at 93.828,54.8 h1.27; Top Overlay "*" at 92.329,56.134 h1.27